# Altium PCB PCB4.pcbdoc
Units mil, origin at the board's own origin, x right, y up, seen from the top; angles counter-clockwise.
Board outline 2940 x 3280 mil, 2 copper layers (Top Layer, Bottom Layer); 10 components, 32 nets, 82 pads, 26 vias.
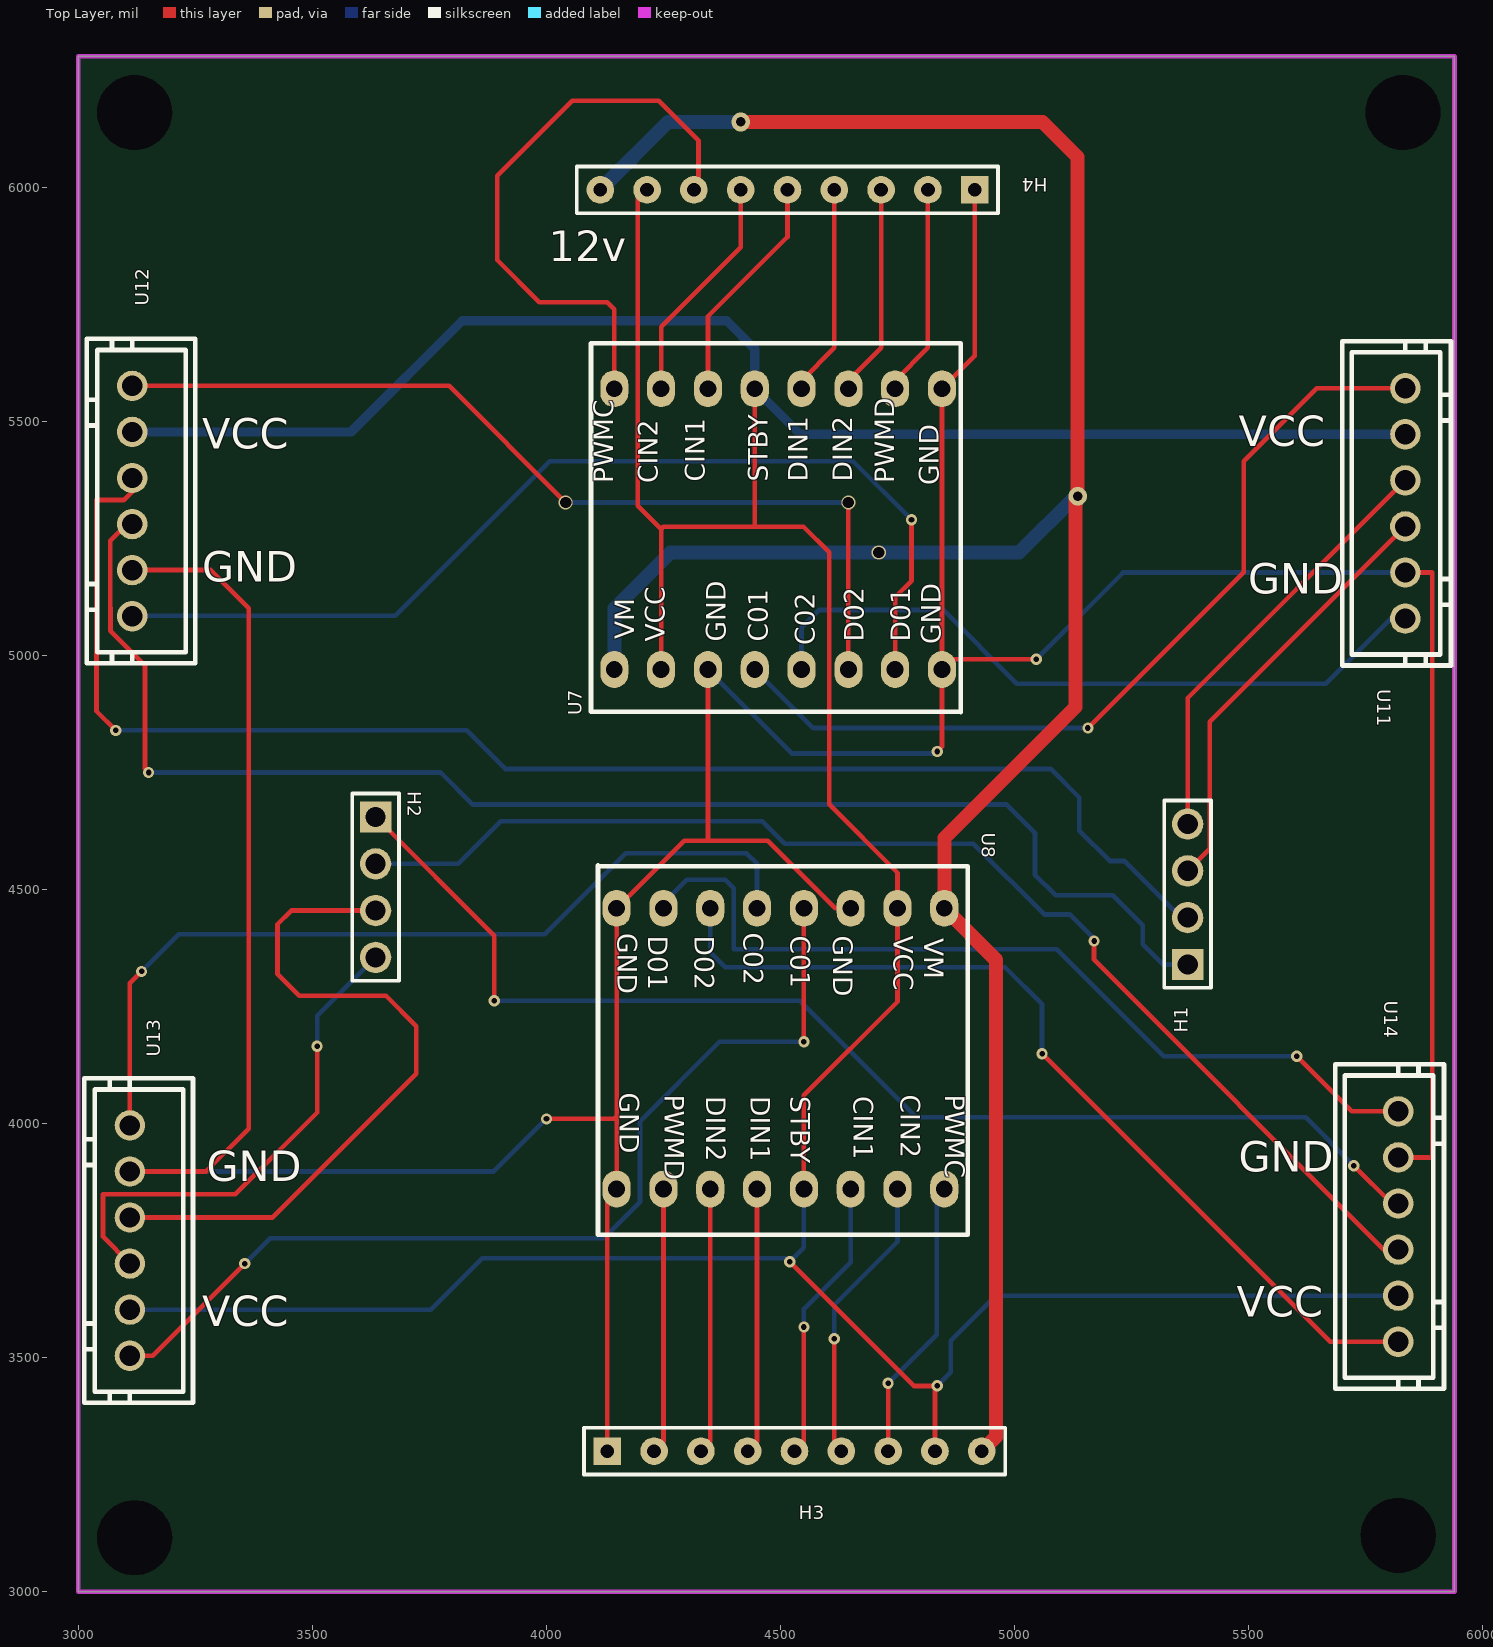
[diagram p0: Top Layer view]
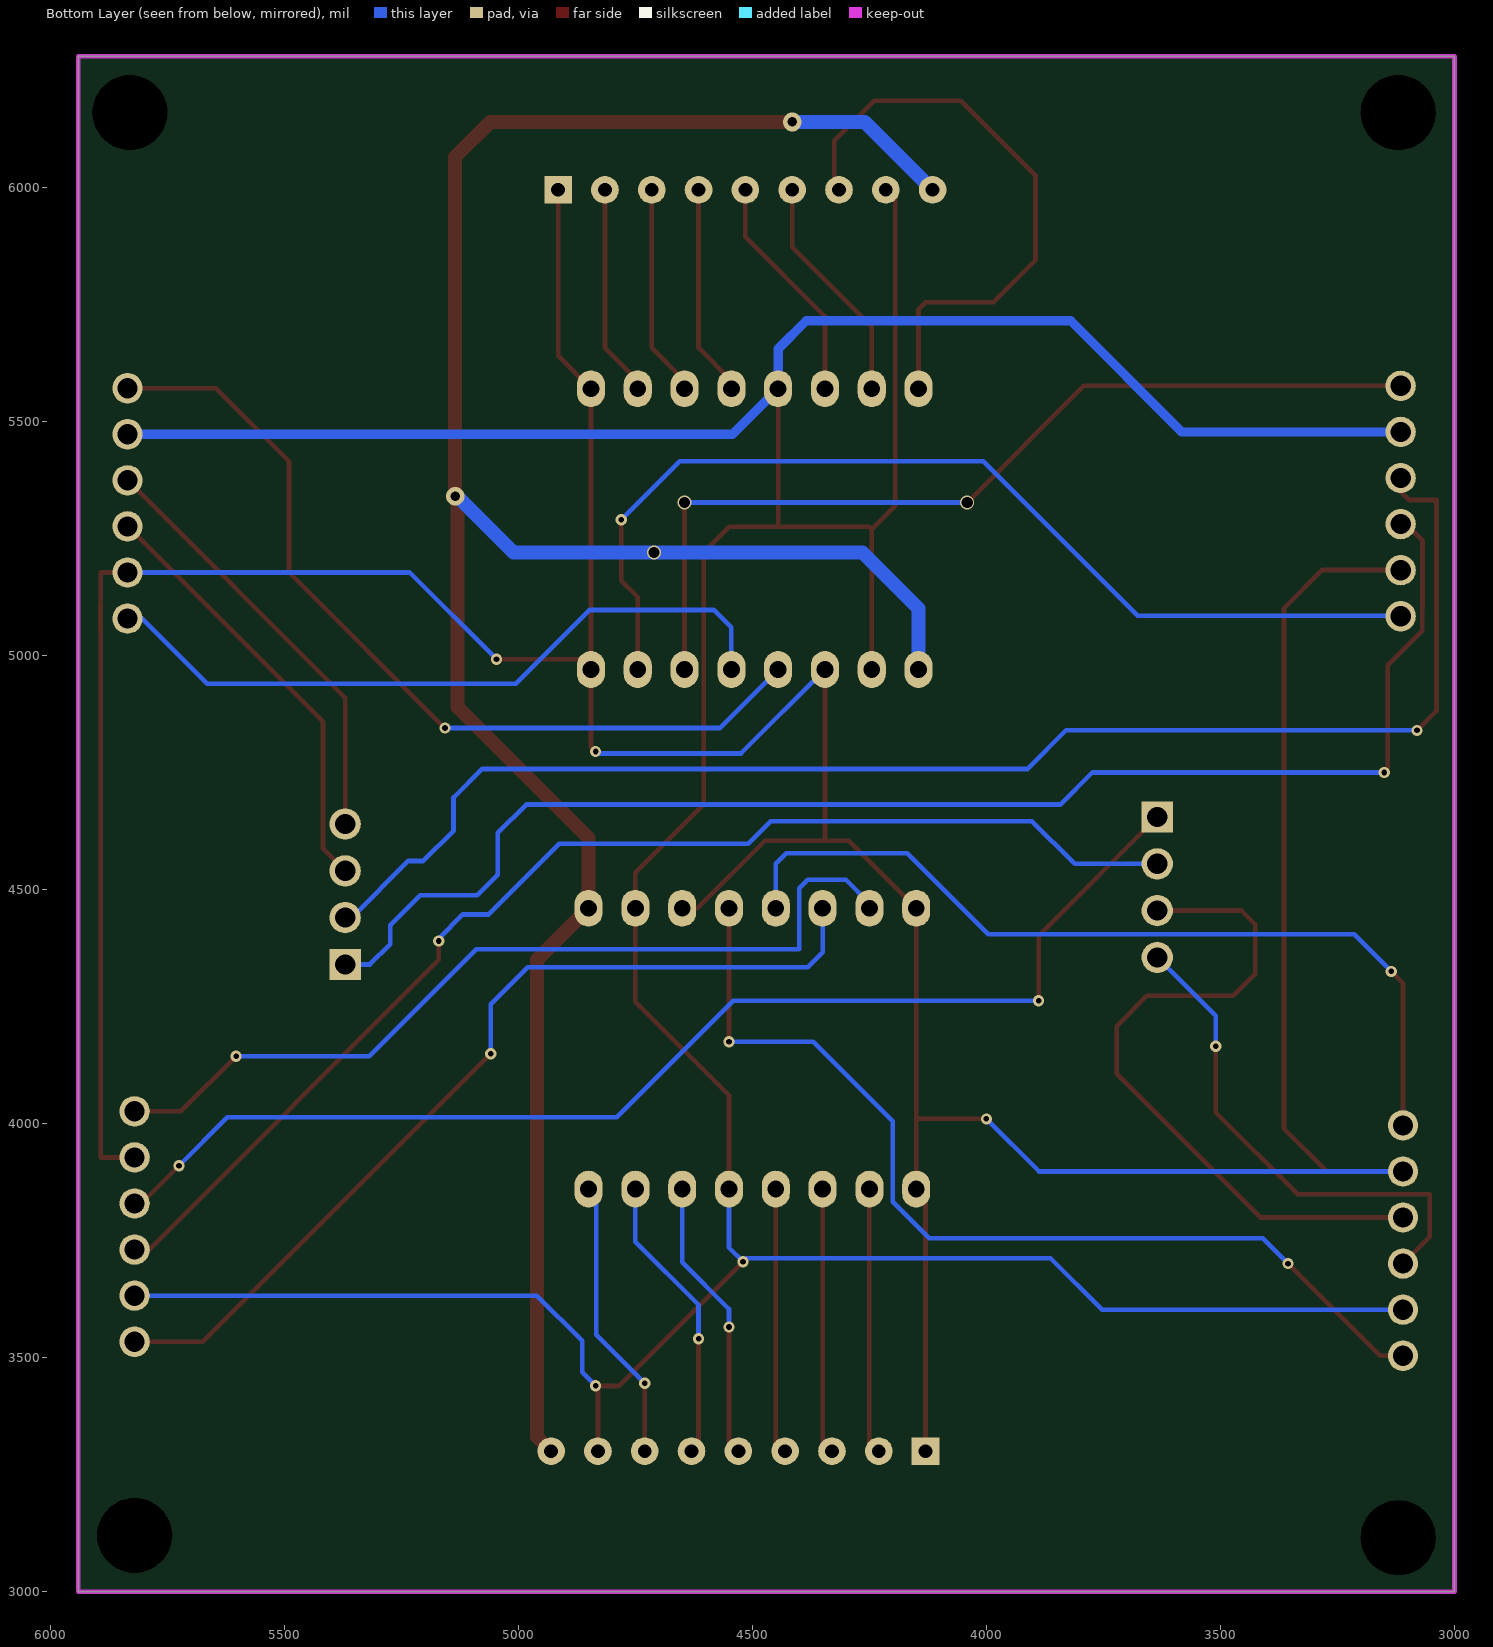
[diagram p1: Bottom Layer view, seen from below]

## Layer stack, top to bottom
Top Layer: signal copper (thickness not stored)
Dielectric: dielectric 12.6, FR-4, Dk 4.8
Bottom Layer: signal copper (thickness not stored)

## Board outline
3000,3000 5940,3000 5940,6280 3000,6280
cut-out: 3200,6160 ccw(c3120,6160) 3040,6160 ccw(c3120,6160)
cut-out: 5910,6160 ccw(c5830,6160) 5750,6160 ccw(c5830,6160)
cut-out: 5900,3120 ccw(c5820,3120) 5740,3120 ccw(c5820,3120)
cut-out: 3200,3115 ccw(c3120,3115) 3040,3115 ccw(c3120,3115)

## Components (designator, comment, footprint, x,y, rotation, side; value= is the part's Value field where it differs from the comment)
H1 "排针2" HDR-TH_4P-P2.54-V-M-1 5370,4490 r90 top
H2 "排针2" HDR-TH_4P-P2.54-V-M-1 3635,4505 r270 top
H3 "排针9P-2.54MM直插" 排针2.54MM9P 4130,3300 r0 top
H4 "排针9P-2.54MM直插" 排针2.54MM9P 4915,5995 r180 top
U7 "TB6612" TB6612 4495,5270 r90 top
U8 "TB6612" TB6612 4500,4160 r270 top
U11 "HDGC2501WV-6P" CONN-TH_XH2.54-6P 5835,5325 r270 top
U12 "HDGC2501WV-6P" CONN-TH_XH2.54-6P 3115,5330 r90 top
U13 "HDGC2501WV-6P" CONN-TH_XH2.54-6P 3110,3750 r90 top
U14 "HDGC2501WV-6P" CONN-TH_XH2.54-6P 5820,3780 r270 top

## Footprints (in the part's own frame and the unit in brackets; to place one, negate y for a bottom-side part, rotate by r counter-clockwise, add the part's x,y. Pads: shape width x height; smd on the part's side, far side on the other; paste and mask are expansions set on the pad)
CONN-TH_XH2.54-6P [mm]
  round 1.65 hole 1.1 paste+0 mask+0.05: 1(-6.25,0) 2(-3.75,0) 3(-1.25,0) 4(1.25,0) 5(3.75,0) 6(6.25,0)
  silkscreen extent -8.8,-3.43 8.8,2.47
HDR-TH_4P-P2.54-V-M-1 [mm]
  rect 1.7x1.7 hole 1.1 paste+0 mask+0.051: 1(-3.81,0)
  round 1.7 hole 1.1 paste+0 mask+0.051: 2(-1.27,0) 3(1.27,0) 4(3.81,0)
  silkscreen extent -5.08,-1.27 5.08,1.27
TB6612 [mil]
  oval 78.74x60 hole 36 paste+0 mask+4: 1(-300,350) 2(-300,250) 3(-300,150) 4(-300,50) 5(-300,-50) 6(-300,-150) 7(-300,-250) 8(-300,-350) 9(300,350) 10(300,250) 11(300,150) 12(300,50) 13(300,-50) 14(300,-150) 15(300,-250) 16(300,-350)
  silkscreen extent -391,-390 397,400
排针2.54MM9P [mm]
  rect 1.5x1.5 hole 0.75 paste+0 mask+0.102: 1(0,0)
  round 1.5 hole 0.75 paste+0 mask+0.102: 2(2.54,0) 3(5.08,0) 4(7.62,0) 5(10.16,0) 6(12.7,0) 7(15.24,0) 8(17.78,0) 9(20.32,0)
  silkscreen extent -1.27,-1.27 21.59,1.27

## Via types
v1: diameter 24.02, hole 12.01, Top Layer to Bottom Layer, 21 vias
v2: diameter 30, hole 24, Top Layer to Bottom Layer, 3 vias
v3: diameter 40, hole 20, Top Layer to Bottom Layer, 2 vias

## Nets (pads, with @x,y where several pads share a name; then routed paths per layer and width w, separated by ;. In a path a pad name is that pad's centre, name@x,y a point inside that pad or via, vN(x,y) a via of type N, cw(c..) or ccw(c..) an arc to the next point about the centre after c; other vN are vias at no path point)
+12V: H3.9 H4.9 U7.1 U8.1 | length 5266.6
  Top Layer w30: v3(4415,6140) 5060,6140 5135,6065 v3(5135,5340) 5130,5335 5130,4889.87 4850,4609.87 U8.1 4960,4350 4960,3330 H3.9
  Bottom Layer w30: H4.9 4260,6140 v3(4415,6140) ; U7.1 4145,5100 4265,5220 v2(4710,5220) 5010,5220 v3@5130,5340
GND: H3.1 H4.1 U7.3 U7.8 U7.16 U8.3 U8.8 U8.16 U11.5 U12.2 U13.5 U14.2 | length 9176.1
  Top Layer w10: U13.5 3272.64,3897.64 3364.23,3989.23 3364.23,5100.77 3282.17,5182.83 3115,5182.83 U12.2 ; v1(4000,4010) 4143.94,4010 4150,4016.06 ; H3.1 4130,3840 U8.16 4150,4016.06 ; U7.3 4345,4604.31 ; U8.3 4617.33,4460 4473.02,4604.31 4345,4604.31 ; v1(4835,4795) 4845,4805 U7.8 U7.8@4845,4991.99 ; H4.1 4915,5640 U7.16 U7.8@4845,4991.99 ; v1(5046.58,4991.99) U7.8@4845,4991.99 ; U14.2 5892.32,3927.64 5892.32,5054.91 5892.73,5054.91 5892.73,5105.79 5892.32,5105.79 5892.32,5177.36 U11.5 ; 4150,4016.06 U8.8 4294.31,4604.31 4345,4604.31
  Bottom Layer w10: U13.5 3887.64,3897.64 v1(4000,4010) ; U7.3 4524.31,4790.69 4830.69,4790.69 v1(4835,4795) ; v1(5046.58,4991.99) 5231.96,5177.36 U11.5
M11: U7.4 U11.1 | length 1874.4
  Top Layer w10: v1(5156.79,4845) 5490,5178.21 5490,5415 5646.06,5571.06 U11.1
  Bottom Layer w10: U7.4 4570,4845 v1@5150,4845
M12: U7.5 U11.6 | length 1518.5
  Bottom Layer w10: U7.5 4545,5060 4582.38,5097.38 4847.49,5097.38 5005.19,4939.68 5664.68,4939.68 5803.94,5078.94 U11.6
M21: U7.6 U12.6 | length 2004.4
  Top Layer w10: U12.6 3791.91,5576.06 v2(4041.15,5326.82) ; U7.6 v2@4645,5335
  Bottom Layer w10: v2@4035,5326.82 v2(4645,5326.82)
M22: U7.7 U12.1 | length 2188.4
  Top Layer w10: U7.7 4745,5125 4780,5160 v1(4780,5290)
  Bottom Layer w10: U12.1 3116.06,5085 3677.15,5085 4007.15,5415 4655,5415 v1(4780,5290)
M31: U8.4 U13.1 | length 2104.2
  Top Layer w10: U13.1 3158.71,3503.94 v1(3355.55,3700.78) ; v1(4550,4175) U8.4
  Bottom Layer w10: v1(3355.55,3700.78) 3409.77,3755 4122.47,3755 4200,3832.53 4200,4005.29 4369.71,4175 v1(4550,4175)
M32: U8.5 U13.6 | length 1863.4
  Top Layer w10: U13.6 3110,4300 v1(3135,4325)
  Bottom Layer w10: v1(3135,4325) 3214.51,4404.51 3995.92,4404.51 4169.17,4577.76 4427.24,4577.76 4450,4555 U8.5
M41: U8.6 U14.6 | length 1970.7
  Top Layer w10: v1(5058.9,4149.25) 5674.21,3533.94 U14.6
  Bottom Layer w10: U8.6 4350,4365.75 4381.57,4334.18 4979.68,4334.18 5058.9,4254.97 v1(5058.9,4149.25)
M42: U8.7 U14.1 | length 1882.3
  Top Layer w10: v1(5603.04,4143.88) 5720.86,4026.06 U14.1
  Bottom Layer w10: U8.7 4250,4470.69 4300,4520.69 4381.78,4520.69 4400,4502.47 4400,4372.62 5089.88,4372.62 5318.61,4143.88 v1(5603.04,4143.88)
PA0: H4.7 U7.9 | length 1284.1
  Top Layer w10: U7.9 4145,5740 4130,5755 3985,5755 3895,5845 3895,6025 4055,6185 4240,6185 4325,6100 4325,6005 H4.7
PA1: H4.2 U7.15 | length 454
  Top Layer w10: U7.15 4745,5587.38 4815,5657.38 H4.2
PA2: H3.7 U8.9 | length 609.7
  Top Layer w10: H3.7 v1(4730,3445)
  Bottom Layer w10: v1(4730,3445) 4833.75,3548.75 4833.75,3843.75 U8.9
PA3: H3.2 U8.15 | length 568.3
  Top Layer w10: H3.2 4250,3320 U8.15
PA6: H4.6 U7.10 | length 495.4
  Top Layer w10: U7.10 4245,5702.15 4415,5872.15 H4.6
PA7: H4.5 U7.11 | length 495.4
  Top Layer w10: U7.11 4345,5724.23 4515,5894.23 H4.5
PD12: H1.4 U11.3 | length 926.8
  Top Layer w10: H1.4 5370,4909.21 U11.3
PD13: H1.3 U11.4 | length 928.4
  Top Layer w10: H1.3 5417.23,4587.23 5417.23,4858.02 U11.4
PD14: H1.2 U12.4 | length 3119.5
  Top Layer w10: v1(3080,4840) 3038.54,4881.46 3038.54,5332.04 3096.77,5332.04 3115,5350.27 U12.4
  Bottom Layer w10: v1(3080,4840) 3830,4840 3911.73,4758.27 3911.73,4757.69 5077.31,4757.69 5138.39,4696.61 5138.39,4626.04 5203.39,4561.04 5234.82,4561.04 5355.86,4440 H1.2
PD15: H1.1 U12.3 | length 3056.2
  Top Layer w10: U12.3 3102.65,5268.44 3091.6,5268.44 3068.21,5245.04 3068.21,5101.87 3068.54,5101.54 3068.54,5053.12 3142.24,4979.42 3142.24,4757.76 v1(3150,4750)
  Bottom Layer w10: v1(3150,4750) 3774.12,4750 3842.6,4681.52 4983.48,4681.52 5043.73,4621.27 5043.73,4532 5088.12,4487.61 5209.81,4487.61 5273.8,4423.61 5273.8,4383.36 5317.16,4340 H1.1
PE9: H2.4 U13.3 | length 1084.7
  Top Layer w10: U13.3 3052.72,3758.07 3052.72,3848.9 3335.28,3848.9 3510,4023.61 v1(3510,4165)
  Bottom Layer w10: v1(3510,4165) 3510,4230 H2.4
PE11: H2.3 U13.4 | length 1510.9
  Top Layer w10: U13.4 3414.21,3799.21 3721.85,4106.85 3721.85,4208.15 3657.23,4272.77 3472.23,4272.77 3425.3,4319.7 3425.3,4425.3 3455,4455 H2.3
PE13: H2.2 U14.4 | length 2628.5
  Top Layer w10: v1(5170,4390) 5170,4349.79 5789,3730.79 U14.4
  Bottom Layer w10: H2.2 3811.49,4555 3902.68,4646.19 4460.78,4646.19 4509.22,4597.76 4912.31,4597.76 5063.35,4446.72 5118.34,4446.72 5170,4395.06 v1(5170,4390)
PE14: H2.1 U14.3 | length 2608.6
  Top Layer w10: H2.1 3888.51,4401.49 v1(3888.51,4262.29) ; v1(5725,3910) 5805.79,3829.21 U14.3
  Bottom Layer w10: v1(3888.51,4262.29) 4541.06,4262.29 4790.22,4013.14 5621.86,4013.14 v1(5725,3910)
PF11: H4.4 U7.13 | length 454
  Top Layer w10: U7.13 4545,5587.38 4615,5657.38 H4.4
PF12: H4.3 U7.14 | length 454
  Top Layer w10: U7.14 4645,5587.38 4715,5657.38 H4.3
PF13: H3.6 U8.10 | length 622.1
  Top Layer w10: v1(4615,3540) 4615,3315 H3.6
  Bottom Layer w10: v1(4615,3540) 4615,3612.38 4750,3747.38 U8.10
PF14: H3.5 U8.11 | length 609.7
  Top Layer w10: H3.5 4550,3320 v1(4550,3565.39)
  Bottom Layer w10: v1(4550,3565.39) 4550,3603.72 4650,3703.72 U8.11
PG2: H3.4 U8.13 | length 568.3
  Top Layer w10: H3.4 4450,3320 U8.13
PG3: H3.3 U8.14 | length 568.3
  Top Layer w10: H3.3 4350,3320 U8.14
VCC: H3.8 H4.8 U7.2 U7.12 U8.2 U8.12 U11.2 U12.5 U13.2 U14.5 | length 9499.5
  Top Layer w10: H4.8 4195,5975 4195,5320 4245,5270 ; U7.2 4245,5270 ; U7.12 4445,5275 ; v1(4520,3705) 4785.76,3439.24 v1@4830,3439.24 ; U8.12 4550,4060 4750,4260 U8.2 4750,4536.16 4604.02,4682.15 4604.02,5220.14 4549.16,5275 4445,5275 ; H3.8 v1@4830,3439.24 ; v1(4835,3440) 4830.76,3440 v1@4830,3439.24 ; 4245,5270 4250,5275 4445,5275
  Bottom Layer w10: U13.2 3752.95,3602.36 3863.07,3712.49 4512.51,3712.49 v1(4520,3705) 4550,3735 U8.12 ; v1(4835,3440) 4863.74,3468.74 4863.74,3535.8 4960.31,3632.36 U14.5
  Bottom Layer w20: U12.5 3582.64,5477.64 3820,5715 4385,5715 4445,5655 U7.12 4542.36,5472.64 U11.2
"": 

## Keep-outs
Board Outline Layer:
  the board outline again, w10

## Silkscreen, mask and mechanical layers (free items; w line width, h text height)
Top Silkscreen Layer:
  text "12v" at 4004.46,5842.2 h64.9
  text "VCC" at 5479.46,5447.2 h64.9
  text "VCC" at 3264.46,5442.2 h64.9
  text "GND" at 3264.46,5157.2 h64.9
  text "GND" at 5499.46,5132.2 h64.9
  text "GND" at 5479.46,3897.2 h64.9
  text "GND" at 3274.46,3877.2 h64.9
  text "VCC" at 5474.46,3587.2 h64.9
  text "VCC" at 3264.46,3567.2 h64.9
Mechanical Layer:
  circle w1 net "": c3120,6160 r80
  circle w1 net "": c5830,6160 r80
  circle w1 net "": c5820,3120 r80
  circle w1 net "": c3120,3115 r80

## Text inside footprints (layer, text, board x,y; h text height)
U7: Top Silkscreen Layer "GND" at 4382.66,5028.89 h41.44 r90; Top Silkscreen Layer "VCC" at 4252.9,5028.89 h41.44 r90; Top Silkscreen Layer "C01" at 4472.66,5028.89 h41.44 r90; Top Silkscreen Layer "C02" at 4573.06,5021.81 h41.44 r90; Top Silkscreen Layer "D02" at 4677.66,5028.89 h41.44 r90; Top Silkscreen Layer "D01" at 4777.66,5028.89 h41.44 r90; Top Silkscreen Layer "VM" at 4187.66,5034.39 h41.44 r90; Top Silkscreen Layer "GND" at 4842.9,5023.89 h41.44 r90; Top Silkscreen Layer "PWMC" at 4142.66,5368.39 h41.44 r90; Top Silkscreen Layer "CIN2" at 4237.66,5368.39 h41.44 r90; Top Silkscreen Layer "CIN1" at 4338.06,5371.31 h41.44 r90; Top Silkscreen Layer "STBY" at 4473.06,5371.31 h41.44 r90; Top Silkscreen Layer "DIN1" at 4558.06,5371.31 h41.44 r90; Top Silkscreen Layer "DIN2" at 4653.06,5371.31 h41.44 r90; Top Silkscreen Layer "PWMD" at 4742.66,5368.39 h41.44 r90; Top Silkscreen Layer "GND" at 4837.9,5363.89 h41.44 r90
U8: Top Silkscreen Layer "GND" at 4612.34,4401.11 h41.44 r270; Top Silkscreen Layer "VCC" at 4742.1,4401.11 h41.44 r270; Top Silkscreen Layer "C01" at 4522.34,4401.11 h41.44 r270; Top Silkscreen Layer "C02" at 4421.94,4408.19 h41.44 r270; Top Silkscreen Layer "D02" at 4317.34,4401.11 h41.44 r270; Top Silkscreen Layer "D01" at 4217.34,4401.11 h41.44 r270; Top Silkscreen Layer "VM" at 4807.34,4395.61 h41.44 r270; Top Silkscreen Layer "GND" at 4152.1,4406.11 h41.44 r270; Top Silkscreen Layer "PWMC" at 4852.34,4061.61 h41.44 r270; Top Silkscreen Layer "CIN2" at 4757.34,4061.61 h41.44 r270; Top Silkscreen Layer "CIN1" at 4656.94,4058.69 h41.44 r270; Top Silkscreen Layer "STBY" at 4521.94,4058.69 h41.44 r270; Top Silkscreen Layer "DIN1" at 4436.94,4058.69 h41.44 r270; Top Silkscreen Layer "DIN2" at 4341.94,4058.69 h41.44 r270; Top Silkscreen Layer "PWMD" at 4252.34,4061.61 h41.44 r270; Top Silkscreen Layer "GND" at 4157.1,4066.11 h41.44 r270